# Altium PCB PCB1.PcbDoc (part 3 of 3)
Units mm, origin at the board's own origin, x right, y up, seen from the top; angles counter-clockwise.
Board outline 200 x 55 mm, 4 copper layers (Top Layer, Layer 1, Layer 2, Bottom Layer), stack 1.714 mm thick; 312 components, 230 nets, 1114 pads, 714 vias.
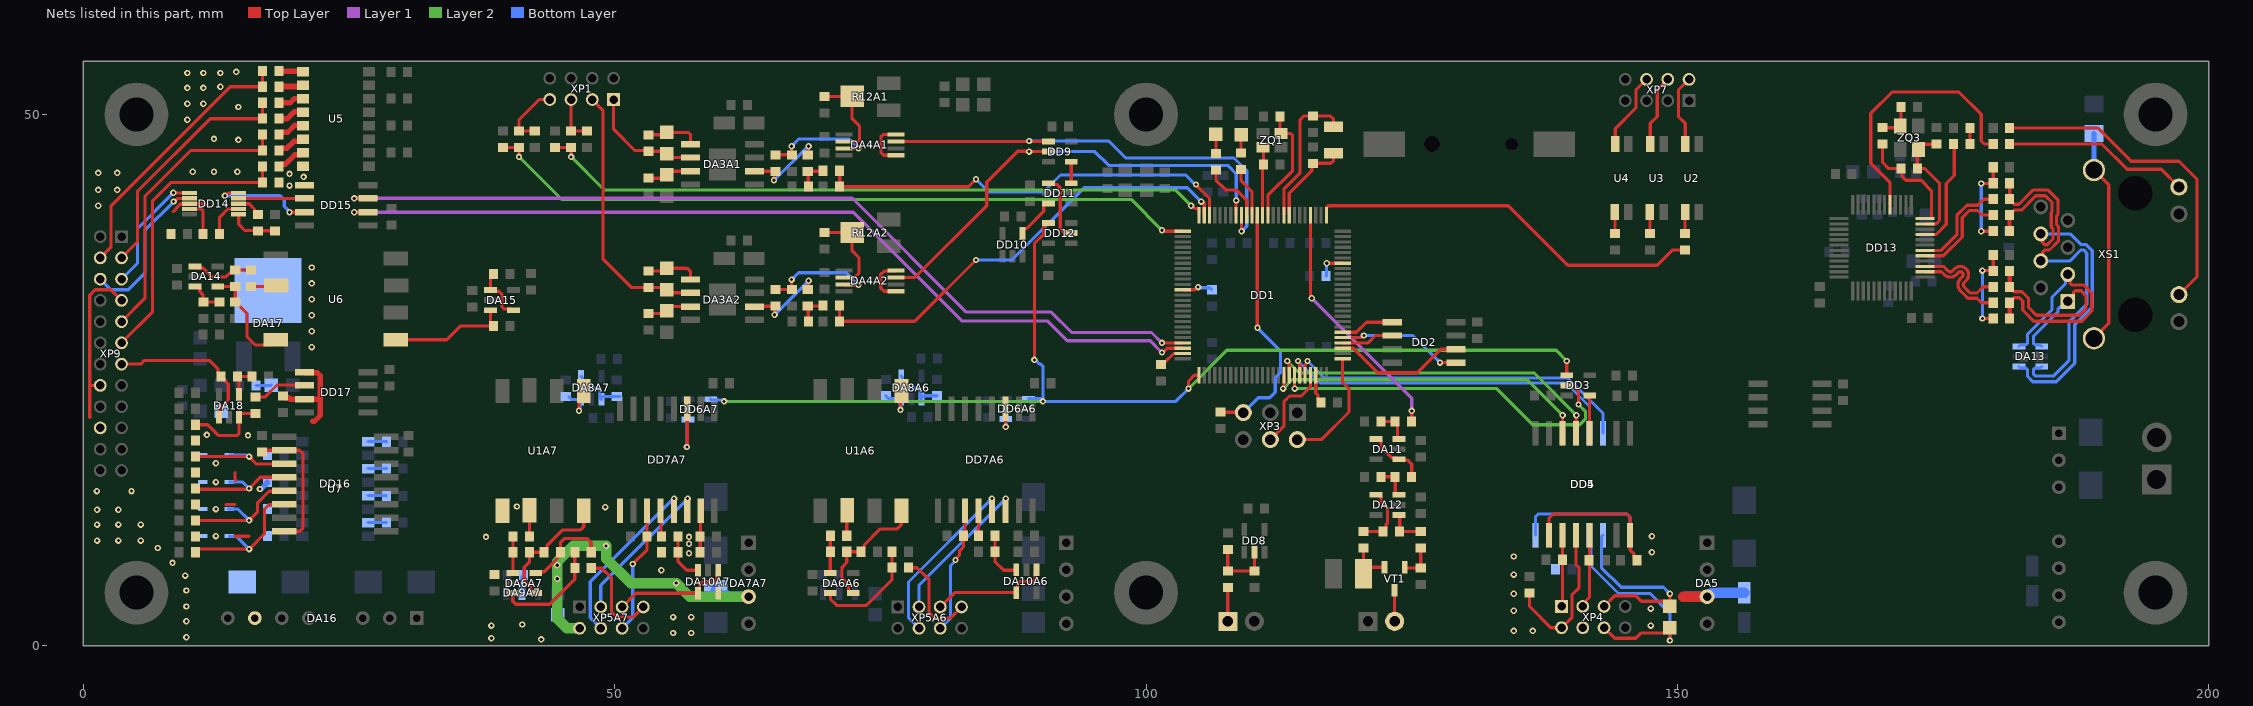
[diagram p5: the nets of this part, all layers, seen from the top]

## Via types
v1: diameter 0.6, hole 0.3, Top Layer to Bottom Layer, tented both sides, 714 vias

## Nets (pads, with @x,y where several pads share a name; then routed paths per layer and width w, separated by ;. In a path a pad name is that pad's centre, name@x,y a point inside that pad or via, vN(x,y) a via of type N, cw(c..) or ccw(c..) an arc to the next point about the centre after c; other vN are vias at no path point) (continued)
GND_DRVA7: C41A7.2 C43A7.2 C44A7.2 C45A7.1 C46A7.2 C48A7.2 C49A7.2 DA6A7.5 DA7A7.3 DA9A7.2 DA10A7.5 DD7A7.9 DD7A7.15 R22A7.2 R24A7.2 U1A7.1 XP5A7.2 | length 46.4
  Top Layer w0.3: DA6A7.5@42.566,6.85 42.679,6.964 43.364,6.964 44.625,8.225 44.625,8.525 R24A7.2@44.9,8.8 44.9,9.7 45.3,10.1 47.4,10.1 47.8,9.7 R22A7.2@47.8,8.8 ; C48A7.2@58.05,8.8 C44A7.2@58.05,10.3 58.085,10.335 58.085,12.665 DD7A7.15@58.12,12.7
  Layer 2 w1: XP5A7.2@46.7,1.65 45.519,1.65 44.6,2.569 v1(44.6,6.3) v1(44.6,7.571) 44.6,7.9 46.1,9.4 v1(49.2,9.4) 49.2,8.2 51.5,5.9 v1(55.8,5.9) 57.08,4.62 DA7A7.3@62.6,4.62
  Bottom Layer w0.2: C49A7.2@41.3,6.559 C49A7.2@41.408,6.667
  Bottom Layer w0.3: DA9A7.2@41.3,5 41.3,5.075 C49A7.2@41.3,6.559
  Bottom Layer w1: C43A7.2@59.5,5.2 60,4.7 60.606,4.7 60.686,4.62 DA7A7.3@62.6,4.62
  other v1: 43.1,0.6 38.4,0.7 55.5,1.2 57.2,1.2 38.4,1.9 41.3,2 55.5,2.7 57.2,2.7 54.4,7.1 57,8.7 57,9.6 37.9,10.25 57,10.25 49.125,13.05 40.8,13.1
GND_HW: C78.2 C79.2 C83.2 C84.2 C91.1 C92.2 C93.2 C94.2 DA16.7 DA17.2 DD14.1 DD14.8 DD15.5 DD16.2 DD16.8 DD17.5 DD17.7 R56.1 R57.1 R59.1 R60.1 R62.1 R63.1 R64.1 R66.1 R88.1 R90.1 R91.1 R93.1 R94.1 U5.2 U5.4 U5.6 U5.8 VD3.2 VD4.2 VD5.2 VD6.2 XP9.7 XP9.16 XP9.20 | length 62.1
  Top Layer w0.3: 0.6,21.5 0.6,24.5 ; XP9.16@1.6,24.5 0.6,24.5 ; XP9.7@3.6,32.5 2.6,33.5 1.1,33.5 0.6,33 0.6,24.5 ; 8.473,40.85 8.737,41.114 8.737,41.162 9.176,41.6 DD14.8@10,41.6 11.411,41.6 11.543,41.468 ; 13.444,13.27 13.474,13.3 14.275,13.3 ; 14.275,10.3 15.6,10.3 ; 14.275,16.3 14.288,16.287 14.288,15.627 14.345,15.57 ; 14.625,40.35 14.625,39.65 15.196,39.079 16.396,39.079 C79.2@16.425,39.05 C83.2@18.025,39.05 ; C84.2@16.764,18.4 20.344,18.4 20.68,18.064 20.68,11.109 20.351,10.78 DD16.8@18.9,10.78 ; R56.1@18.404,52.621 18.534,52.75 U5.2@20.68,52.75 U5.2@20.53,52.6
  Top Layer w0.5: R62.1@18.425,46.6 18.425,46.65 18.6,46.825 19.171,46.825 19.811,47.465 20.475,47.465 U5.6@20.68,47.67 ; R59.1@18.425,49.6 19.223,49.6 19.88,50.257 20.633,50.257 U5.4@20.68,50.21 ; R56.1@18.425,52.6 U5.2@20.53,52.6 ; C92.2@18.8,23.5 18.975,23.325 19.328,23.325 19.453,23.2 22.3,23.2 ; DD17.5@20.8,25.75 20.85,25.7 22.007,25.7 22.3,25.407 22.3,23.2 ; 21.582,21.125 21.741,21.125 22.3,21.684 22.3,23.2
  Bottom Layer w0.3: C94.2@16.25,24.5 17.665,24.5 C91.1@17.7,24.535
  Bottom Layer w0.5: v1(16.621,14.75) 16.64,14.769 16.744,14.769 17.325,15.35 R91.1@17.325,15.4
  other v1: 9.7,0.8 9.7,2.3 9.7,3.7 9.7,5.2 9.6,6.6 8.4,7.8 7,9.2 1.3,9.9 3.3,9.9 5.4,9.9 12.475,10.32 1.3,11.4 3.3,11.4 5.4,11.4 1.3,12.8 3.3,12.8 12.475,12.86 1.283,14.55 4.537,14.55 12.475,15.4 12.477,17.179 15.5,19.8 11.632,19.845 21.5,28.1 21.5,29.6 21.5,31.1 21.5,32.6 21.5,34.1 21.5,35.6 1.4,41.4 1.4,42.9 3.2,42.9 19.4,43.3 20.737,44.125 19.4,44.4 1.4,44.5 3.2,44.5 10.3,44.6 12.3,44.6 14.5,44.6 14.6,47.6 12.3,47.7 9.8,49.5 14.6,50.7 9.8,51 11.3,51 9.8,52.5 11.3,52.5 12.9,52.6 9.8,53.9 11.3,53.9 12.9,53.9 14.4,54
GND_PS: C35.2 C36.2 C37.2 DA5.3 DD4.2 DD4.8 DD5.9 DD5.16 XP4.4 | length 34.3
  Top Layer w0.3: DD4.2@137.92,10.41 137.92,12.013 138.307,12.4 145.268,12.4 145.54,12.128 DD4.8@145.54,10.41 145.568,10.382 145.568,8.985 145.925,8.628 145.925,8.325 C35.2@146.2,8.05
  Top Layer w1: 150.569,4.62 DA5.3@152.8,4.62
  Bottom Layer w0.3: DD5.16@136.65,10.41 136.65,12.15 136.9,12.4 145.268,12.4 145.54,12.128 DD5.9@145.54,10.41
  Bottom Layer w1: 150.791,4.62 DA5.3@152.8,4.62 152.908,4.62 153.288,5 C37.2@156.3,5
  other v1: 134.6,1.4 136.4,1.4 147.5,1.9 134.6,3.3 147.5,3.5 134.6,4.9 134.6,6.7 134.6,8.4 147.6,8.8 147.6,10.3
GUIDE_LAS: DD1.4 R29.1 | length 23.4
  Top Layer w0.3: DD1.4@115.475,40.525 115.475,32.906 115.6,32.781 v1(115.6,32.7) ; R29.1@125,21.1 v1(125,22.1)
  Layer 1 w0.3: v1(115.6,32.7) 125,23.3 v1(125,22.1)
IL1_HW: R56.2 R69.1 XP9.4 | length 25.8
  Top Layer w0.3: XP9.4@1.6,36.5 2.6,37.5 2.6,41.376 13.824,52.6 R56.2@16.949,52.6 ; R56.2@16.875,52.6 R69.1@16.875,54.1
IL2_HW: R59.2 R70.1 XP9.3 | length 23
  Top Layer w0.3: XP9.3@3.6,36.5 5.1,38 5.1,42.77 11.93,49.6 R59.2@16.875,49.6 R70.1@16.875,51.1
INT_IL: DD1.51 DD3.1 DD6A6.1 DD6A7.1 DD12.4 | length 105.5
  Top Layer w0.3: v1(89.5,26.9) 89.5,37.858 90.374,38.732 90.374,39.658 90.499,39.783 DD12.4@90.824,39.783 ; v1(104,24.2) 104.001,24.902 104.551,25.453 104.975,25.453 DD1.51@104.975,25.474 ; DD3.1@139.6,25.45 v1(139.6,26.8)
  Layer 2 w0.3: v1(60.3,23) v1(90.3,23) ; v1(104,24.2) 107.601,27.8 138.601,27.8 v1(139.6,26.8)
  Bottom Layer w0.3: DD6A7.1@59.05,23.2 59.132,23.119 60.1,23.119 60.219,23 v1(60.3,23) ; DD6A6.1@88.951,23.248 DD6A6.1@89.276,23.248 ; DD6A6.1@89.401,23.248 90.252,23.248 v1@90.3,23.2 ; v1(89.5,26.9) 89.581,26.9 89.969,26.512 90.088,26.512 90.3,26.3 v1@90.3,23.2 ; v1@104,24.199 102.801,23 v1(90.3,23) v1@90.3,23.2
KEY_HW: R62.2 R71.1 XP9.9 | length 27
  Top Layer w0.3: XP9.9@3.6,30.5 5.8,32.7 5.8,42.279 10.121,46.6 R62.2@16.85,46.6 ; R62.2@16.875,46.6 R71.1@16.875,48.1
LED1: DD1.15 R5.1 | length 4.7
  Top Layer w0.3: R5.1@108.95,44.8 108.95,43.75 109.975,42.725 DD1.15@109.975,40.525
LED2: DD1.16 R6.1 | length 6
  Top Layer w0.3: R6.1@106.582,44.777 106.582,43.818 107.5,42.9 108.5,42.9 109.475,41.925 DD1.16@109.475,40.525
LNKn: DD13.17 R50.2 | length 25.2
  Top Layer w0.3: DD13.17@170,41.5 170,43.6 168.2,45.4 168.2,50.1 170.2,52.1 176.5,52.1 178.6,50 178.6,47.5 178.888,47.212 R50.2@179.725,47.212
MEM_CS: DD1.81 DD2.1 | length 5.1
  Top Layer w0.3: DD1.81@118.5,29.5 119.8,29.5 120.746,30.446 DD2.1@123.171,30.446
MEM_MISO: DD1.79 DD2.2 | length 5
  Top Layer w0.3: DD1.79@118.5,28.5 120.9,28.5 121.596,29.196 DD2.2@123.171,29.196
MEM_MOSI: DD1.80 DD2.5 | length 11.8
  Top Layer w0.3: DD1.80@118.5,29 120.192,29 120.392,29.2 v1(120.5,29.2) ; v1(127.671,26.646) DD2.5@129.171,26.646
  Bottom Layer w0.3: v1(120.5,29.2) 125.116,29.2 v1(127.671,26.646)
MEM_SCLK: DD1.78 DD2.6 | length 12.5
  Top Layer w0.3: DD1.78@118.5,28 119.5,28 121.812,25.688 125.513,25.688 127.721,27.896 DD2.6@129.171,27.896
MP_EN_HW: R64.2 R72.1 XP9.11 | length 27.1
  Top Layer w0.3: XP9.11@3.6,28.5 6.5,31.4 6.5,41.83 8.27,43.6 R64.2@16.8,43.6 ; R64.2@16.875,43.6 R72.1@16.875,45.1
NetC12_1: C12.1 DD1.49 | length 2.5
  Top Layer w0.3: C12.1@101.4,26.45 101.675,26.725 101.826,26.725 102.601,27.5 DD1.49@103.45,27.5
NetC14_1: C14.1 DD1.73 | length 2.8
  Top Layer w0.3: DD1.73@115.975,25.475 115.975,23.777 116.183,23.569 116.183,23.167 C14.1@116.45,22.9
NetC23A1_2: C23A1.2 DA3A1.3 R7A1.1 | length 4.2
  Top Layer w0.3: C23A1.2@53.18,44 54.615,44 R7A1.1@54.915,44.3 55.265,44.65 DA3A1.3@57.15,44.65
NetC23A2_2: C23A2.2 DA3A2.3 R7A2.1 | length 4.2
  Top Layer w0.3: C23A2.2@53.179,31.253 54.649,31.253 R7A2.1@54.914,31.518 55.312,31.916 DA3A2.3@57.149,31.916
NetC24A1_1: C24A1.1 DA3A1.1 R8A1.1 | length 5
  Top Layer w0.3: C24A1.1@53.18,48.085 54.7,48.085 R8A1.1@54.915,48.3 56.95,48.3 57.15,48.1 DA3A1.1@57.15,47.2
NetC24A2_1: C24A2.1 DA3A2.1 R8A2.1 | length 4.9
  Top Layer w0.3: C24A2.1@53.179,35.253 54.649,35.253 R8A2.1@54.914,35.518 56.822,35.518 57.149,35.191 DA3A2.1@57.149,34.466
NetC27A1_1: C27A1.1 DA4A1.3 R9A1.2 | length 10.7
  Top Layer w0.3: R9A1.2@65.15,46.2 C27A1.1@66.674,46.2 66.65,46.224 v1(66.65,47) ; DA4A1.3@71.574,46.8 v1(72.95,46.8)
  Bottom Layer w0.3: v1(66.65,47) 67.35,47.7 72.05,47.7 v1(72.95,46.8)
NetC27A2_1: C27A2.1 DA4A2.3 R9A2.2 | length 10.9
  Top Layer w0.3: R9A2.2@65.149,33.541 65.154,33.536 66.668,33.536 C27A2.1@66.673,33.531 66.649,33.555 v1(66.649,34.453) ; DA4A2.3@71.573,34.006 71.599,33.979 72.923,33.979 v1(72.949,33.953)
  Bottom Layer w0.3: v1(66.649,34.453) 67.299,35.103 71.799,35.103 v1(72.949,33.953)
NetC42A6_1: C42A6.1 DA6A6.1 R23A6.1 | length 3.5
  Top Layer w0.3: R23A6.1@70.291,10.35 C42A6.1@70.291,8.85 70.291,6.859 DA6A6.1@70.3,6.85
NetC42A6_2: C42A6.2 DA6A6.4 R24A6.1 U1A6.4 | length 12.5
  Top Layer w0.3: DA6A6.4@72.45,4.95 72.125,4.95 72,5.075 72,5.738 71.4,6.338 71.4,7.4 71.841,7.841 C42A6.2@71.841,8.85 R24A6.1@73.191,8.85 73.466,9.125 73.466,9.466 75,11 76.587,11 76.987,11.4 76.987,12.746 U1A6.4@76.991,12.75
NetC42A7_1: C42A7.1 DA6A7.1 R23A7.1 | length 3.5
  Top Layer w0.3: DA6A7.1@40.416,6.85 40.45,6.884 C42A7.1@40.45,8.8 R23A7.1@40.45,10.3
NetC42A7_2: C42A7.2 DA6A7.4 R24A7.1 U1A7.4 | length 12.5
  Top Layer w0.3: DA6A7.4@42.566,4.95 42.241,4.95 42.116,5.075 42.116,5.584 41.5,6.2 41.5,7.4 42,7.9 C42A7.2@42,8.8 R24A7.1@43.35,8.8 43.625,9.075 43.625,9.425 45.1,10.9 46.8,10.9 47.1,11.2 U1A7.4@47.1,12.7
NetC46A6_1: C46A6.1 DA10A6.3 R26A6.2 | length 4.8
  Top Layer w0.3: R26A6.2@85.791,10.35 C46A6.1@85.791,8.85 85.791,7.909 86.6,7.1 87.741,7.1 DA10A6.3@87.791,7.15
NetC46A7_1: C46A7.1 DA10A7.3 R26A7.2 | length 4.6
  Top Layer w0.3: R26A7.2@55.95,10.3 55.95,7.95 56.8,7.1 DA10A7.3@57.85,7.1
NetC51_1: C51.1 DA11.3 R29.2 | length 3.1
  Top Layer w0.3: C51.1@122.1,21.1 R29.2@123.45,21.1 123.675,20.875 DA11.3@123.675,19.45
NetC54_1: C54.1 DA12.1 R32.1 | length 3.5
  Top Layer w0.3: DA12.1@123.871,12.307 C54.1@123.871,10.757 R32.1@125.871,10.757
NetC54_2: C54.2 DA12.4 R33.1 | length 6.1
  Top Layer w0.3: R33.1@120.471,10.757 C54.2@122.321,10.757 122.596,11.032 122.596,11.447 122.731,11.583 122.731,12.869 122.1,13.5 122.1,13.907 122.1,14.082 121.975,14.207 DA12.4@121.65,14.207
NetC55_1: C55.1 DD8.2 R39.2 R40.1 | length 6.3
  Top Layer w0.3: R40.1@107.7,9.05 R39.2@107.7,7.05 C55.1@110.2,7.05 DD8.2@110.2,8.8
NetC62_1: C62.1 XS1.13 XS1.14 | length 20.4
  Top Layer w0.3: XS1.13@189.2,28.932 190.6,30.332 190.6,43.372 XS1.14@189.2,44.772
  Bottom Layer w0.5: XS1.14@189.2,44.772 C62.1@189.2,48.2
NetC64_1: C64.1 R41.2 R42.2 | length 8.1
  Top Layer w0.3: v1(178.7,30.8) 179.703,30.8 R41.2@179.725,30.778 ; v1(178.7,35.3) 179.703,35.3 R42.2@179.725,35.278 C64.1@179.725,36.778
  Bottom Layer w0.3: v1(178.7,30.8) v1(178.7,35.3)
NetC65_1: C65.1 R43.2 R44.2 | length 8.3
  Top Layer w0.3: v1(178.6,39) 179.7,39 R43.2@179.725,39.025 ; v1(178.6,43.5) 179.7,43.5 R44.2@179.725,43.525 C65.1@179.725,45.025
  Bottom Layer w0.3: v1(178.6,39) v1(178.6,43.5)
NetC69_1: C69.1 R54.2 ZQ3.3 | length 3.6
  Top Layer w0.3: R54.2@169.3,48.75 170.825,48.75 ZQ3.3@170.975,48.9 171.05,48.975 C69.1@171.05,50.7
NetC79_1: C79.1 DD14.3 | length 2.4
  Top Layer w0.3: DD14.3@14.6,41.6 15.6,41.6 16.1,41.1 16.1,40.875 16.375,40.6 C79.1@16.425,40.6
NetC81_1: C81.1 DD14.9 | length 3.4
  Top Layer w0.3: DD14.9@10.117,41.1 11.099,41.1 11.275,40.924 C81.1@11.275,38.75
NetC81_2: C81.2 DD14.2 | length 3.7
  Top Layer w0.3: C81.2@12.825,38.75 12.825,40.325 13.6,41.1 DD14.2@14.6,41.1
NetC82_1: C82.1 DA14.1 R75.1 | length 6
  Top Layer w0.3: DA14.1@10.502,35.7 10.627,35.575 11.225,35.575 12.09,34.71 13.413,34.71 13.777,35.075 14.025,35.075 C82.1@14.3,35.35 ; C82.1@14.25,35.35 R75.1@15.8,35.35
NetC82_2: C82.2 DA14.4 R77.1 U6.4 | length 10.1
  Top Layer w0.3: DA14.4@12.652,33.8 C82.2@14.3,33.8 R77.1@14.3,32.35 14.35,32.35 15.4,31.3 15.4,29.1 16.2,28.3 17.624,28.3 U6.4@18.124,28.8
NetC95_1: C95.1 DA18.3 R87.2 | length 7.9
  Top Layer w0.3: C95.1@10.575,20.8 11.7,20.8 12.7,19.8 14.482,19.8 14.658,19.976 14.658,21.725 14.783,21.85 R87.2@16.2,21.85
NetDA3A1_6: DA3A1.6 R9A1.1 R10A1.1 | length 8.3
  Top Layer w0.3: DA3A1.6@63.15,44.65 R9A1.1@65.15,44.65 65,44.5 v1(65,43.8) ; R10A1.1@68.174,46.2 68.25,46.276 v1(68.25,47)
  Bottom Layer w0.3: v1(65,43.8) 68.2,47 v1(68.25,47)
NetDA3A2_6: DA3A2.6 R9A2.1 R10A2.1 | length 8.2
  Top Layer w0.3: DA3A2.6@63.149,31.916 63.186,31.954 65.111,31.954 65.049,31.891 v1(65.049,31.153) ; R10A2.1@68.173,33.531 68.249,33.607 v1(68.249,34.353)
  Bottom Layer w0.3: v1(65.049,31.153) v1(68.249,34.353)
NetDA4A1_2: DA4A1.2 R11A1.2 R12A1.2 | length 8.5
  Top Layer w0.3: R11A1.2@69.747,51.7 R12A1.2@72.347,51.7 72.347,49.575 73.047,48.875 73.047,47.626 72.871,47.45 DA4A1.2@71.574,47.45
NetDA4A1_5: DA4A1.5 DA4A1.8 | length 4.5
  Top Layer w0.3: DA4A1.5@76.474,46.15 75.32,46.15 75.05,46.42 75.05,47.9 75.25,48.1 DA4A1.8@76.474,48.1
NetDA4A2_2: DA4A2.2 R11A2.2 R12A2.2 | length 8.3
  Top Layer w0.3: R11A2.2@69.747,38.9 R12A2.2@72.347,38.9 72.347,37.159 72.993,36.512 72.993,35.047 72.606,34.659 71.577,34.659 DA4A2.2@71.573,34.656
NetDA4A2_5: DA4A2.5 DA4A2.8 | length 4.4
  Top Layer w0.3: DA4A2.5@76.473,33.356 75.346,33.356 75.049,33.653 75.049,34.953 75.352,35.256 76.423,35.256 DA4A2.8@76.473,35.306
NetDA6A6_3: DA6A6.3 R21A6.2 R22A6.1 | length 10.2
  Top Layer w0.3: DA6A6.3@70.3,4.95 70.3,4.4 70.9,3.8 73.7,3.8 76.091,6.191 R21A6.2@76.091,7.35 R22A6.1@76.091,8.85
NetDA6A7_3: DA6A7.3 R21A7.2 R22A7.1 | length 10.2
  Top Layer w0.3: DA6A7.3@40.416,4.95 40.416,4.184 40.7,3.9 43.9,3.9 46.25,6.25 R21A7.2@46.25,7.3 R22A7.1@46.25,8.8
NetDA8A6_1: DA8A6.1 DA8A6.4 R28A6.1 | length 5.3
  Bottom Layer w0.3: DA8A6.4@76.968,25.375 77.093,25.25 77.093,24.602 77.393,24.302 78.476,24.302 78.743,24.035 78.743,23.35 DA8A6.1@78.868,23.225 78.868,23.401 78.993,23.526 R28A6.1@80.327,23.526
NetDA8A6_3: DA8A6.3 R27A6.1 U1A6.5 | length 4.4
  Top Layer w0.3: v1(76.9,22.2) 76.9,23.884 U1A6.5@76.991,23.975
  Bottom Layer w0.3: R27A6.1@75.527,23.526 75.802,23.251 76.027,23.251 76.028,23.25 DA8A6.3@76.968,23.25 ; v1(76.9,22.2) 76.934,22.234 76.934,23.191 DA8A6.3@76.968,23.225
NetDA8A7_1: DA8A7.1 DA8A7.4 R28A7.1 | length 5.6
  Bottom Layer w0.3: DA8A7.4@46.85,25.35 46.972,25.228 46.972,24.446 47.147,24.27 48.454,24.27 48.63,24.095 48.63,23.32 DA8A7.1@48.75,23.2 48.75,23.325 48.875,23.45 R28A7.1@50.5,23.45
NetDA8A7_3: DA8A7.3 R27A7.1 U1A7.5 | length 4.5
  Top Layer w0.3: v1(46.65,22.11) 46.65,23.525 U1A7.5@47.1,23.975
  Bottom Layer w0.3: R27A7.1@45.7,23.45 45.975,23.175 46.425,23.175 46.85,23.175 46.733,23.058 46.733,22.275 46.65,22.192 v1(46.65,22.11)
NetDA10A6_1: DA10A6.1 DA10A6.4 XP5A6.5 | length 11.4
  Top Layer w0.3: XP5A6.5@80.641,3.65 81.991,5 DA10A6.4@87.791,5 87.916,5.125 87.916,5.874 88.091,6.05 89.39,6.05 89.566,6.225 89.566,7.025 DA10A6.1@89.691,7.15
NetDA10A7_1: DA10A7.1 DA10A7.4 XP5A7.5 | length 11.3
  Top Layer w0.3: XP5A7.5@50.7,3.65 52,4.95 DA10A7.4@57.85,4.95 57.975,5.075 57.975,5.775 58.2,6 59.3,6 59.625,6.325 59.625,6.975 DA10A7.1@59.75,7.1
NetDA11_1: DA11.1 DA11.4 R30.1 | length 5.9
  Top Layer w0.3: DA11.4@121.65,19.45 121.975,19.45 122.1,19.325 122.1,18.7 123.125,17.675 123.675,17.675 123.881,17.469 124.631,17.469 125,17.1 R30.1@125,15.9
NetDA12_3: DA12.3 R30.2 R31.1 | length 3.4
  Top Layer w0.3: R31.1@122.1,15.9 R30.2@123.45,15.9 123.45,14.332 123.575,14.207 DA12.3@123.871,14.207
NetDA14_3: DA14.3 R61.2 R65.1 | length 3.5
  Top Layer w0.3: DA14.3@10.502,33.8 10.827,33.8 10.952,33.675 10.952,33.35 11.253,33.049 11.253,32.397 R61.2@11.3,32.35 R65.1@12.8,32.35
NetDA15_1: DA15.1 DA15.4 R82.1 | length 5.3
  Top Layer w0.3: R82.1@38.6,34.979 38.6,34.929 38.324,34.653 DA15.1@38.324,33.479 38.442,33.362 39.118,33.362 39.4,33.079 39.4,31.88 39.576,31.704 40.349,31.704 DA15.4@40.474,31.579
NetDA15_3: DA15.3 R81.1 U6.5 | length 11.2
  Top Layer w0.3: U6.5@29.399,28.8 34.2,28.8 35.479,30.079 R81.1@38.325,30.079 ; DA15.3@38.324,31.579 38.324,30.854 38.325,30.853 R81.1@38.325,30.079 ; R81.1@38.6,30.079 R81.1@38.325,30.079
NetDA18_4: DA18.4 R89.2 R92.1 | length 3.2
  Top Layer w0.3: DA18.4@14.658,23.65 14.658,25.197 R92.1@14.505,25.35 15.949,25.35 R89.2@15.966,25.333
NetDD1_37: DD1.37 R3.1 | length 2.9
  Top Layer w0.3: DD1.37@103.45,33.5 104.586,33.5 104.836,33.75 v1(104.9,33.75)
  Bottom Layer w0.3: v1(104.9,33.75) 104.957,33.693 105.998,33.693 R3.1@106.134,33.556
NetDD1_94: DD1.94 R4.1 | length 2.7
  Top Layer w0.3: v1(117,36) 117.75,36 DD1.94@118.5,36
  Bottom Layer w0.3: R4.1@116.95,34.8 116.975,34.825 116.975,35.975 v1(117,36)
NetDD3_4: DD3.4 DD4.12 | length 3.5
  Top Layer w0.3: DD4.12@141.73,20.01 DD3.4@141.73,23.55
NetDD4_3: DD4.3 R17.2 XP4.1 | length 6.7
  Top Layer w0.3: XP4.1@139.1,3.7 139.19,3.79 DD4.3@139.19,10.41
NetDD4_4: DD4.4 R19.2 XP4.2 | length 14.6
  Top Layer w0.3: R19.2@136.1,4.95 136.1,3.7 138.1,1.7 XP4.2@139.1,1.7 140.1,2.7 140.1,4.826 140.75,5.476 140.75,7.351 140.46,7.641 DD4.4@140.46,10.41
NetDD4_5: DD4.5 R20.2 XP4.3 | length 7
  Top Layer w0.3: XP4.3@141.1,3.7 141.1,3.925 141.73,4.555 DD4.5@141.73,10.41
NetDD5_11: DD5.11 R18.1 XP4.5 | length 18.8
  Top Layer w0.3: XP4.5@143.1,3.7 144.1,4.7 146.1,4.7 146.615,4.185 148.815,4.185 R18.1@149.3,3.7 v1(149.3,4.9)
  Bottom Layer w0.3: DD5.11@143,10.41 142.856,10.266 142.856,7.359 144.715,5.5 148.7,5.5 v1(149.3,4.9)
NetDD5_12: DD5.12 R18.2 XP4.6 | length 23
  Top Layer w0.3: XP4.6@143.1,1.7 144.1,0.7 146.1,0.7 146.615,1.215 148.815,1.215 R18.2@149.3,1.7 v1(149.3,0.5)
  Bottom Layer w0.3: DD5.12@141.73,10.41 141.872,10.267 141.872,7.507 144.463,4.916 147.459,4.916 149.3,3.075 v1(149.3,0.5)
NetDD6A6_4: DD6A6.4 DD7A6.3 | length 2.5
  Top Layer w0.3: DD7A6.3@86.781,22.35 86.79,22.34 86.79,20.61 v1(86.8,20.6)
  Bottom Layer w0.3: v1(86.8,20.6) DD6A6.4@86.8,21.348
NetDD6A7_4: DD6A7.4 DD7A7.3 | length 6.3
  Top Layer w0.3: v1(56.8,18.7) 56.825,18.725 56.825,22.275 DD7A7.3@56.85,22.3
  Bottom Layer w0.3: v1(56.8,18.7) 56.8,21.2 DD6A7.4@56.9,21.3
NetDD7A6_11: DD7A6.11 R25A6.1 XP5A6.6 | length 12
  Top Layer w0.3: v1(82.072,8.072) 82.072,8.153 82.458,8.539 82.458,8.958 82.841,9.341 R25A6.1@82.841,10.35 ; R25A6.1@82.891,10.35 82.971,10.35 DD7A6.11@82.971,12.7
  Bottom Layer w0.3: XP5A6.6@80.641,1.65 81.6,2.609 81.6,7.519 82.072,7.991 v1(82.072,8.072)
NetDD7A6_12: DD7A6.12 R26A6.1 | length 2.4
  Top Layer w0.3: R26A6.1@84.241,10.35 DD7A6.12@84.241,12.75
NetDD7A6_13: DD7A6.13 XP5A6.4 | length 17
  Top Layer w0.3: v1(85.5,13.85) 85.505,13.845 85.505,12.705 DD7A6.13@85.511,12.7
  Bottom Layer w0.3: XP5A6.4@78.641,1.65 77.653,2.637 77.653,6.003 v1(85.5,13.85)
NetDD7A6_14: DD7A6.14 XP5A6.3 | length 14.7
  Top Layer w0.3: DD7A6.14@86.781,12.7 86.79,12.71 86.79,13.84 v1(86.8,13.85)
  Bottom Layer w0.3: XP5A6.3@78.641,3.65 78.641,5.691 v1(86.8,13.85)
NetDD7A7_11: DD7A7.11 R25A7.1 XP5A7.6 | length 12
  Top Layer w0.3: v1(51.7,7.7) 53.05,9.05 R25A7.1@53.05,10.3 53.045,10.305 53.045,12.695 DD7A7.11@53.04,12.7
  Bottom Layer w0.3: XP5A7.6@50.7,1.65 51.7,2.65 v1(51.7,7.7)
NetDD7A7_12: DD7A7.12 R26A7.1 | length 2.4
  Top Layer w0.3: DD7A7.12@54.31,12.7 54.355,12.655 54.355,10.345 R26A7.1@54.4,10.3
NetDD7A7_13: DD7A7.13 XP5A7.4 | length 17.1
  Top Layer w0.3: DD7A7.13@55.58,12.7 55.59,12.71 55.59,13.84 v1(55.599,13.85)
  Bottom Layer w0.3: XP5A7.4@48.7,1.65 47.7,2.65 47.7,6.032 55.518,13.85 v1(55.599,13.85)
NetDD7A7_14: DD7A7.14 XP5A7.3 | length 14.7
  Top Layer w0.3: DD7A7.14@56.85,12.7 56.859,12.709 56.859,13.841 v1(56.867,13.85)
  Bottom Layer w0.3: XP5A7.3@48.7,3.65 48.7,5.683 v1(56.867,13.85)
NetDD9_4: DD9.4 DD11.3 | length 2
  Top Layer w0.3: DD11.3@92.975,43.528 DD9.4@92.975,45.55
NetDD10_4: DD10.4 DD11.6 | length 4.2
  Top Layer w0.3: DD10.4@88.381,38.802 88.381,39.127 88.506,39.252 88.753,39.252 90.375,40.874 90.375,41.503 90.5,41.628 DD11.6@90.825,41.628
NetDD11_4: DD11.4 DD12.2 | length 6.4
  Top Layer w0.3: DD11.4@90.825,43.528 90.95,43.403 91.647,43.403 91.933,43.117 91.933,39.217 92.192,38.958 92.849,38.958 DD12.2@92.974,38.833
NetDD13_9: DD13.9 R53.2 | length 10.2
  Top Layer w0.3: DD13.9@173.3,38.7 174.05,38.7 174.345,38.7 175.3,39.655 175.3,43.5 176.051,44.251 R53.2@176.051,47.126
NetDD14_4: DD14.4 DD15.6 | length 6.2
  Top Layer w0.3: DD14.4@14.6,42.1 DD15.6@20.8,42.1
NetDD14_5: DD14.5 DD15.7 | length 9.9
  Top Layer w0.3: v1(13.325,42.35) 13.406,42.35 13.656,42.6 DD14.5@14.625,42.6 ; v1(19.4,40.8) DD15.7@20.8,40.8
  Bottom Layer w0.3: v1(13.325,42.35) 18.525,42.35 18.918,41.957 18.918,41.363 19.4,40.881 v1(19.4,40.8)
NetDD16_3: DD16.3 R73.2 VD6.1 | length 11
  Top Layer w0.3: R73.2@10.575,17.8 13.875,17.8 v1(15.6,17.8) 16.3,17.1 18.87,17.1 DD16.3@18.9,17.13 DD16.3@19.4,17.13
  Bottom Layer w0.3: VD6.1@13.75,17.94 15.379,17.94 15.519,17.8 v1(15.6,17.8)
NetDD16_4: DD16.4 R67.2 VD5.1 | length 10.9
  Top Layer w0.3: R67.2@10.575,14.8 10.643,14.732 15.45,14.732 15.519,14.8 v1(15.6,14.8) 16.66,15.86 DD16.4@18.9,15.86
  Bottom Layer w0.3: VD5.1@13.75,15.4 15,15.4 v1(15.6,14.8)
NetDD16_5: DD16.5 R74.2 VD4.1 | length 12.4
  Top Layer w0.3: R74.2@10.575,11.8 v1(15.6,11.8) 16.4,12.6 16.4,13.47 17.476,14.546 18.856,14.546 DD16.5@18.9,14.59
  Bottom Layer w0.3: VD4.1@13.612,12.872 14.534,12.872 v1@15.603,11.803
NetDD16_6: DD16.6 R68.2 VD3.1 | length 13.9
  Top Layer w0.3: R68.2@10.575,8.8 10.575,8.825 10.85,9.1 v1(15.6,9.1) 17.05,10.55 17.05,12.85 17.476,13.276 18.856,13.276 DD16.6@18.9,13.32
  Bottom Layer w0.3: VD3.1@13.75,10.3 13.758,10.292 14.408,10.292 v1(15.6,9.1)
NetDD17_6: DD17.6 R87.1 | length 5.1
  Top Layer w0.3: R87.1@16.2,23.4 17.09,23.4 18.225,24.535 20.765,24.535 DD17.6@20.8,24.5
NetR5_2: R5.2 VD1.1 | length 1.8
  Top Layer w0.3: R5.2@108.95,46.35 VD1.1@108.95,48.1
NetR6_2: R6.2 VD2.1 | length 1.8
  Top Layer w0.3: R6.2@106.582,46.327 VD2.1@106.582,48.127
NetR10A1_2: R10A1.2 R13A1.1 R14A1.1 | length 2.9
  Top Layer w0.3: R13A1.1@68.224,43.2 68.224,44.6 R10A1.2@68.174,44.65 69.574,44.65 R14A1.1@69.624,44.7
NetR10A2_2: R10A2.2 R13A2.1 R14A2.1 | length 2.9
  Top Layer w0.3: R13A2.1@68.223,30.531 68.223,31.931 R10A2.2@68.173,31.981 69.573,31.981 R14A2.1@69.623,32.031
NetR21A6_1: R21A6.1 XP5A6.7 | length 9.1
  Top Layer w0.3: R21A6.1@77.716,7.35 78.45,7.35 79.591,6.209 79.591,3.109 80.1,2.6 81.591,2.6 XP5A6.7@82.641,3.65
NetR21A7_1: R21A7.1 XP5A7.7 | length 9.1
  Top Layer w0.3: R21A7.1@47.8,7.3 48.8,7.3 49.7,6.4 49.7,3.2 50.2,2.7 51.75,2.7 XP5A7.7@52.7,3.65
NetR23A6_2: R23A6.2 U1A6.2 | length 2.5
  Top Layer w0.3: R23A6.2@71.841,10.35 71.841,12.75 U1A6.2@71.891,12.8
NetR23A7_2: R23A7.2 U1A7.2 | length 2.5
  Top Layer w0.3: R23A7.2@42,10.3 U1A7.2@42,12.75
NetR32_2: R32.2 R34.2 VT1.1 | length 3.5
  Top Layer w0.3: VT1.1@124.346,7.382 124.421,7.307 R34.2@125.871,7.307 ; R34.2@125.85,7.307 R32.2@125.85,9.207
NetR33_2: R33.2 R35.2 VT1.2 | length 4.6
  Top Layer w0.3: R35.2@120.446,6.782 R35.2@120.471,6.807 ; R33.2@120.471,9.207 R35.2@120.471,6.807 ; VT1.2@122.446,7.382 121.046,7.382 R35.2@120.471,6.807
NetR36_1: R36.1 U2.1 | length 2
  Top Layer w0.3: R36.1@150.7,38.8 150.7,38.875 150.725,38.9 U2.1@150.725,40.8
NetR37_1: R37.1 U3.1 | length 2
  Top Layer w0.3: R37.1@147.425,38.8 147.425,38.875 U3.1@147.425,40.8
NetR38_1: R38.1 U4.1 | length 2
  Top Layer w0.3: R38.1@144.125,38.8 144.125,38.875 U4.1@144.125,40.8
NetR39_1: R39.1 XP8.1 | length 3.2
  Top Layer w0.3: XP8.1@107.7,2.3 R39.1@107.7,5.5
NetR47_1: R47.1 XS1.10 | length 31.2
  Top Layer w0.3: R47.1@181.275,48.712 189.588,48.712 192.7,45.6 197.2,45.6 198.9,43.9 198.9,34.74 XS1.10@197.2,33.04
NetR50_1: R50.1 XS1.12 | length 17.6
  Top Layer w0.3: R50.1@181.275,47.212 189.947,47.212 192.326,44.832 195.538,44.832 XS1.12@197.2,43.17
NetR51_2: R51.2 R53.1 | length 1.5
  Top Layer w0.3: R53.1@177.525,47.212 R51.2@177.525,48.712
NetR69_2: R69.2 U5.1 | length 2.3
  Top Layer w0.3: R69.2@18.425,54.1 R69.2@18.456,54.069 ; U5.1@20.631,54.069 U5.1@20.68,54.02
  Top Layer w0.5: R69.2@18.456,54.069 U5.1@20.631,54.069
NetR70_2: R70.2 U5.3 | length 2.4
  Top Layer w0.5: R70.2@18.425,51.1 19.475,51.1 19.88,51.505 20.655,51.505 U5.3@20.68,51.48
NetR71_2: R71.2 U5.5 | length 2.7
  Top Layer w0.5: R71.2@18.425,48.1 18.425,48.15 18.6,48.325 19.239,48.325 19.88,48.966 20.654,48.966 U5.5@20.68,48.94
NetR72_2: R72.2 U5.7 | length 2.8
  Top Layer w0.5: R72.2@18.425,45.1 18.425,45.15 18.6,45.325 19.032,45.325 19.902,46.195 20.475,46.195 U5.7@20.68,46.4
NetR75_2: R75.2 U6.2 | length 2.4
  Top Layer w0.3: R75.2@15.8,33.8 18.074,33.8 U6.2@18.174,33.9
NetR83_1: R83.1 U7.1 | length 1.7
  Bottom Layer w0.3: U7.1@26.82,19.21 28.515,19.21 R83.1@28.525,19.2
NetR84_1: R84.1 U7.3 | length 1.7
  Bottom Layer w0.3: U7.3@26.82,16.67 28.495,16.67 R84.1@28.525,16.7
NetR85_1: R85.1 U7.5 | length 1.7
  Bottom Layer w0.3: U7.5@26.82,14.13 28.495,14.13 R85.1@28.525,14.1
NetR86_1: R86.1 U7.7 | length 1.7
  Bottom Layer w0.3: U7.7@26.82,11.59 26.83,11.6 R86.1@28.525,11.6
NetU2_4: U2.4 XP7.2 | length 6.8
  Top Layer w0.3: U2.4@150.75,47.2 150.75,49.15 150.1,49.8 150.1,52.3 XP7.2@151.1,53.3
NetU3_4: U3.4 XP7.4 | length 6.8
  Top Layer w0.3: U3.4@147.45,47.2 147.45,49.15 148.103,49.803 148.103,52.303 XP7.4@149.1,53.3
NetU4_4: U4.4 XP7.6 | length 7.3
  Top Layer w0.3: U4.4@144.15,47.2 144.15,48.65 146.1,50.6 146.1,52.3 XP7.6@147.1,53.3
NetVT1_3: VT1.3 XP6.2 | length 3
  Top Layer w0.3: XP6.2@123.371,2.257 123.396,2.282 VT1.3@123.396,5.232
NRST: C17.1 DD1.14 XP3.5 | length 23.7
  Top Layer w0.3: C17.1@107,22 107.03,21.97 109.13,21.97 XP3.5@109.16,21.94 ; DD1.14@110.475,40.525 110.475,29.939 v1(110.487,29.928)
  Bottom Layer w0.3: XP3.5@109.16,21.94 110.553,23.333 111.633,23.333 112.168,23.868 112.168,25.209 112.646,25.686 112.646,27.769 111.424,28.99 v1(110.487,29.928)
OSC0: C18.1 DD1.12 ZQ1.1 | length 11.3
  Top Layer w0.3: DD1.12@111.475,40.525 111.475,42.375 113.8,44.7 113.8,48.024 113.624,48.2 ZQ1.1@112.7,48.2 112.6,48.3 C18.1@112.6,49.8
OSC1: C21.1 DD1.13 ZQ1.3 | length 6.4
  Top Layer w0.3: DD1.13@110.975,40.525 110.975,45.225 C21.1@111.05,45.3 111.05,46.85 ZQ1.3@111,46.9
OSC32_0: C19.1 DD1.8 ZQ2.1 | length 8.6
  Top Layer w0.3: DD1.8@113.475,40.525 113.475,42.575 115.601,44.701 115.601,45.301 C19.1@115.7,45.4 117.4,45.4 117.65,45.65 ZQ2.1@117.65,46.35
OSC32_1: C20.1 DD1.9 ZQ2.2 | length 13.7
  Top Layer w0.3: DD1.9@112.975,40.525 112.975,42.975 114.5,44.5 114.5,49.5 114.85,49.85 C20.1@115.7,49.85 117.35,49.85 117.65,49.55 ZQ2.2@117.65,48.85
PD1: C24A1.2 DA3A1.2 R8A1.2 XP1.1 | length 11.1
  Top Layer w0.3: XP1.1@49.9,51.4 49.9,48.6 51.9,46.6 53.115,46.6 C24A1.2@53.18,46.535 54.68,46.535 R8A1.2@54.915,46.3 55.265,45.95 DA3A1.2@57.15,45.95
PD1_ADC: C28A1.1 DD1.23 R14A1.2 | length 40.2
  Top Layer w0.3: R14A1.2@71.174,44.7 C28A1.1@71.174,43.2 83.3,43.2 v1(84,43.9) ; v1(104.7,43.4) 105.975,42.125 DD1.23@105.975,40.525
  Bottom Layer w0.3: v1(84,43.9) 85.2,42.7 90.355,42.7 91.955,44.3 103.739,44.3 v1@104.639,43.4
PD1_ERR: DA4A1.7 DD1.17 DD9.1 | length 43.5
  Top Layer w0.3: DA4A1.7@76.474,47.45 88.95,47.45 v1(89,47.5) 89.05,47.45 DD9.1@90.825,47.45 ; DD1.17@108.975,40.525 108.975,39.025 v1(109,39)
  Bottom Layer w0.3: v1(89,47.5) 96.491,47.5 98.091,45.9 108.285,45.9 109.475,44.71 109.475,39.475 v1(109,39)
PD2: C24A2.2 DA3A2.2 R8A2.2 XP1.3 | length 25
  Top Layer w0.3: XP1.3@47.9,51.4 48.9,50.4 48.9,36.4 51.597,33.703 C24A2.2@53.179,33.703 54.729,33.703 55.216,33.216 DA3A2.2@57.149,33.216
PD2_ADC: C28A2.1 DD1.24 R14A2.2 | length 42.7
  Top Layer w0.3: R14A2.2@71.173,32.031 C28A2.1@71.173,30.531 78.231,30.531 v1(84,36.3) ; v1(105.198,41.798) 105.279,41.798 105.427,41.65 105.469,41.65 105.475,41.644 DD1.24@105.475,40.525
  Bottom Layer w0.3: v1(84,36.3) 87.376,36.3 94.176,43.1 103.896,43.1 v1(105.198,41.798)
PD2_ERR: DA4A2.7 DD1.18 DD9.2 | length 44.8
  Top Layer w0.3: DA4A2.7@76.473,34.656 78.256,34.656 85.023,41.423 85.023,43.623 87.928,46.528 88.972,46.528 v1(89,46.5) DD9.2@90.825,46.5 ; DD1.18@108.475,40.525 108.475,41.875 v1(108.5,41.9)
  Bottom Layer w0.3: v1(89,46.5) 95.177,46.5 96.476,45.201 107.695,45.201 108.5,44.396 v1(108.5,41.9)
PMO_HW: DA18.1 R92.2 XP9.13 | length 14.8
  Top Layer w0.3: XP9.13@3.6,26.5 5.4,26.5 5.75,26.85 11.85,26.85 12.684,26.016 12.684,25.621 R92.2@12.955,25.35 ; DA18.1@12.758,21.5 12.883,21.625 12.883,22.372 13.635,23.124 13.635,24.62 R92.2@12.955,25.3
POWER_IND: DD1.1 R36.2 | length 37.4
  Top Layer w0.3: DD1.1@116.975,40.525 116.975,41.224 117.151,41.4 134.1,41.4 139.7,35.8 148.1,35.8 149.55,37.25 R36.2@150.7,37.25
PS_ERR1: DD1.67 DD4.14 | length 31
  Top Layer w0.3: v1(112.9,24.2) 112.975,24.275 DD1.67@112.975,25.475 ; DD4.14@139.19,20.01 139.195,20.015 139.195,21.695 v1(139.2,21.7)
  Layer 2 w0.3: v1(112.9,24.2) 113.74,25.04 135.861,25.04 v1(139.2,21.7)
PS_ERR2: DD1.68 DD4.13 | length 32.4
  Top Layer w0.3: v1(113.3,26.8) 113.3,26.692 113.475,26.517 DD1.68@113.475,25.475 ; DD4.13@140.46,20.01 140.48,20.03 140.48,21.68 v1(140.5,21.7)
  Layer 2 w0.3: v1(113.3,26.8) 114.431,25.669 136.531,25.669 v1(140.5,21.7)
PS_ON: DD1.69 DD3.2 | length 34.5
  Top Layer w0.3: DD1.69@113.975,25.475 113.975,24.225 v1(114,24.2) ; DD3.2@139.6,24.5 139.725,24.375 140.225,24.375 140.7,23.9 v1(140.7,22.7)
  Layer 2 w0.3: v1(114,24.2) 132.999,24.2 136.399,20.8 140.8,20.8 141.371,21.371 141.371,22.029 v1(140.7,22.7)
RD_N: DA13.4 R43.1 R46.2 XS1.6 | length 35.9
  Top Layer w0.3: R46.2@181.275,40.525 181.275,40.575 181.698,40.998 182.379,40.998 183.729,42.347 184.635,42.347 185.25,41.732 185.25,40.806 185.19,40.746 185.19,39.394 185.35,39.234 185.35,38.281 184.806,37.737 184.558,37.737 184.382,37.913 184.382,38.575 XS1.6@184.2,38.757
  Top Layer w0.381: R43.1@181.275,39.025 R46.2@181.275,40.525
  Bottom Layer w0.3: DA13.4@182.15,26.275 182.275,26.15 182.772,26.15 182.948,25.974 182.948,25.346 183.448,24.846 185.646,24.846 187.4,26.6 187.4,30.217 188.892,31.708 188.892,31.762 189.035,31.905 189.035,37.167 188.437,37.764 187.948,37.764 186.955,38.757 XS1.6@184.2,38.757
RD_P: DA13.3 R44.1 R49.2 XS1.4 | length 35
  Top Layer w0.3: R44.1@181.275,43.525 R49.2@181.275,42.025 181.275,41.975 181.698,41.552 182.15,41.552 183.499,42.901 184.864,42.901 185.804,41.962 185.804,40.576 185.69,40.462 185.69,39.601 185.85,39.441 185.85,38.074 185.013,37.237 184.558,37.237 184.382,37.062 184.382,36.4 XS1.4@184.2,36.217
  Bottom Layer w0.3: XS1.4@184.2,36.217 186.955,36.217 187.986,37.249 188.223,37.249 188.519,36.953 188.519,32.119 186.846,30.446 186.846,26.829 185.417,25.4 183.678,25.4 183.502,25.576 183.502,25.974 183.678,26.15 184.175,26.15 DA13.3@184.3,26.275
Rx232: DD1.48 DD15.2 | length 85.1
  Top Layer w0.3: v1(25.5,40.8) DD15.2@27.001,40.8 ; v1(101.5,27.6) 101.608,27.6 102.008,28 DD1.48@103.45,28
  Layer 1 w0.3: v1(25.5,40.8) 72.456,40.8 82.706,30.55 90.755,30.55 92.605,28.7 100.4,28.7 v1(101.5,27.6)
Rx232_HW: DD14.7 XP9.6 | length 15.3
  Top Layer w0.3: v1(8.5,41.8) 8.581,41.8 8.881,42.1 DD14.7@10.571,42.1
  Bottom Layer w0.3: XP9.6@1.6,34.5 2.6,33.5 4.247,33.5 5.8,35.053 5.8,39.1 v1(8.5,41.8)
RxCAN: DD1.70 DD5.5 | length 33.1
  Top Layer w0.3: v1(114.3,26.8) 114.3,26.692 114.475,26.517 DD1.70@114.475,25.475
  Bottom Layer w0.3: v1(114.3,26.8) 116.375,24.725 139.523,24.725 141.73,22.519 DD5.5@141.73,20.01
RXI_N: DD13.5 R46.1 | length 9.4
  Top Layer w0.3: DD13.5@173.3,36.7 175.031,36.7 176.8,38.469 176.8,40.293 177.465,40.958 178.243,40.958 178.675,40.525 R46.1@179.725,40.525
RXI_P: DD13.6 R49.1 | length 9.5
  Top Layer w0.3: DD13.6@173.3,37.2 174.824,37.2 176.3,38.676 176.3,40.5 177.257,41.458 178.258,41.458 178.825,42.025 R49.1@179.725,42.025
SWCLK: DD1.76 XP3.2 | length 11.2
  Top Layer w0.3: XP3.2@114.24,19.4 116.5,19.4 119.1,22 119.1,24.178 118.5,24.778 DD1.76@118.5,27
SWDIO: DD1.72 XP3.4 | length 8.3
  Top Layer w0.3: XP3.4@111.7,19.4 113,20.7 113,22.996 113.504,23.5 114.6,23.5 115.475,24.375 DD1.72@115.475,25.475
T1: R15A3.2 R16A3.1 XP1.5 | length 4.5
  Top Layer w0.3: XP1.5@45.9,51.4 45.9,48.44 R16A3.1@45.885,48.425 R15A3.2@47.385,48.425
T1_ADC: C30A3.1 DD1.25 R16A3.2 | length 64.1
  Top Layer w0.3: C30A3.1@44.385,46.875 R16A3.2@45.885,46.875 45.9,46.86 v1(45.9,46) ; v1(104.242,41.4) 104.323,41.4 104.573,41.15 104.975,41.15 DD1.25@104.975,40.525
  Layer 2 w0.3: v1(45.9,46) 49,42.9 102.742,42.9 v1(104.242,41.4)
T2: R15A4.2 R16A4.1 XP1.7 | length 6.3
  Top Layer w0.3: R15A4.2@42.485,48.425 R16A4.1@40.985,48.425 41,48.44 41,49.505 42.895,51.4 XP1.7@43.9,51.4
T2_ADC: C30A4.1 DD1.26 R16A4.2 | length 67.7
  Top Layer w0.3: C30A4.1@39.485,46.875 R16A4.2@40.985,46.875 41,46.86 v1(41,46) ; v1(101.5,39.1) 101.581,39.1 101.681,39 DD1.26@103.45,39
  Layer 2 w0.3: v1(41,46) 45,42 98.6,42 v1(101.5,39.1)
TD_N: DA13.6 R41.1 R45.2 XS1.3 | length 25.1
  Top Layer w0.3: R45.2@181.275,32.507 181.454,32.507 181.698,32.751 182.197,32.751 182.5,32.447 182.5,31.599 183.554,30.546 188.046,30.546 189,31.5 189,33.183 188.229,33.954 187.125,33.954 186.949,34.13 186.949,34.738 XS1.3@186.74,34.947
  Top Layer w0.381: R41.1@181.275,30.778 R45.2@181.275,32.277
  Bottom Layer w0.3: DA13.6@182.15,28.175 182.275,28.3 182.772,28.3 182.948,28.476 182.948,29.331 185.25,31.633 185.25,32.812 186.531,34.093 186.531,34.738 XS1.3@186.74,34.947
TD_P: DA13.1 R42.1 R48.2 XS1.1 | length 20.6
  Top Layer w0.3: R48.2@181.275,33.778 181.275,33.728 181.698,33.305 182.426,33.305 183.054,32.676 183.054,31.829 183.783,31.1 187.817,31.1 188.446,31.729 188.446,32.954 188,33.4 187.447,33.4 187.271,33.225 187.271,32.939 XS1.1@186.74,32.407
  Top Layer w0.381: R48.2@181.275,33.778 R42.1@181.275,35.278
  Bottom Layer w0.3: DA13.1@184.3,28.175 184.175,28.3 183.678,28.3 183.502,28.476 183.502,29.102 185.804,31.404 185.804,31.682 185.98,31.857 186.19,31.857 XS1.1@186.74,32.407
Tx232: DD1.47 DD15.3 | length 85.1
  Top Layer w0.3: v1(25.5,42.1) DD15.3@26.979,42.1 ; v1(101.5,28.5) 102.3,28.5 DD1.47@103.45,28.5
  Layer 1 w0.3: v1(25.5,42.1) 25.514,42.114 72.386,42.114 83.1,31.4 91.098,31.4 93.015,29.483 100.517,29.483 v1(101.5,28.5)
Tx232_HW: DD14.6 XP9.5 | length 11.7
  Top Layer w0.3: v1(8.481,42.637) 8.5,42.619 10.016,42.619 DD14.6@10.034,42.6
  Bottom Layer w0.3: XP9.5@3.6,34.5 5.1,36 5.1,39.256 v1(8.481,42.637)
TxCAN: DD1.71 DD5.6 | length 33.1
  Top Layer w0.3: DD1.71@114.975,25.475 114.975,26.467 115.2,26.692 v1(115.2,26.8)
  Bottom Layer w0.3: v1(115.2,26.8) 116.8,25.2 139.685,25.2 143,21.885 DD5.6@143,20.01
TXO_N: DD13.2 R45.1 | length 9.4
  Top Layer w0.3: DD13.2@173.3,35.2 174.827,35.2 174.838,35.2 175.042,34.996 175.114,34.924 ; 175.115,34.923 ccw(c175.681,35.488) 176.247,34.923 176.437,35.112 cw(c176.631,34.918) 176.826,35.112 cw(c176.631,34.918) 176.826,34.723 176.636,34.534 ccw(c177.202,33.968) 176.636,33.402 177.033,33.005 177.338,32.7 177.44,32.7 178.2,32.7 178.623,32.277 R45.1@179.725,32.277
TXO_P: DD13.3 R48.1 | length 9.5
  Top Layer w0.3: DD13.3@173.3,35.7 175.045,35.7 175.186,35.559 175.396,35.349 175.469,35.276 ccw(c175.681,35.488) 175.893,35.276 176.083,35.466 cw(c176.631,34.918) 177.179,35.466 cw(c176.631,34.918) 177.181,34.371 176.989,34.18 ccw(c177.202,33.968) 176.989,33.756 177.387,33.359 177.545,33.2 177.94,33.2 178.2,33.2 178.778,33.778 R48.1@179.725,33.778
XSCI: DD13.12 R52.2 R54.1 | length 11
  Top Layer w0.3: R54.1@169.3,47.2 169.3,45.5 169.9,44.9 R52.2@171.025,44.9 171.149,44.776 171.149,44.151 171.5,43.8 172.934,43.8 173.9,42.834 173.9,40.2 DD13.12@173.3,40.2
XSCO: C67.1 DD13.11 R52.1 ZQ3.1 | length 11.4
  Top Layer w0.3: DD13.11@173.3,39.7 174.345,39.7 174.665,40.02 174.665,43.535 173.3,44.9 R52.1@172.575,44.9 172.575,46.575 ZQ3.1@172.7,46.7 172.7,46.75 173.15,47.2 C67.1@174.375,47.2
pads on no net: DA1.3 DA1.5 DA1.8 DA2.4 DA3A1.5 DA3A2.5 DA16.3 DA16.5 DA16.8 DD1.7 DD1.46 DD1.54 DD1.55 DD1.56 DD1.57 DD1.66 DD1.77 DD1.82 DD1.83 DD1.84 DD1.85 DD1.86 DD1.87 DD1.88 DD1.96 DD1.97 DD1.98 DD4.6 DD4.11 DD5.1 DD5.4 DD5.10 DD5.14 DD5.15 DD8.1 DD13.18 DD13.19 DD13.21 DD13.34 DD13.35 DD13.37 DD13.38 DD13.39 DD13.40 DD13.41 DD13.42 DD13.43 DD13.44 DD16.7 U1A6.7 U1A6.8 U1A7.7 U1A7.8 U6.7 U6.8 XP3.6 XP4.7 XP4.8 XP5A6.8 XP5A7.8 XP7.7 XP7.8 XS1. XS1.7 XS1.8

## Polygon pours and split planes (outlines as drawn)
GND on Top Layer "GND_L01_P006" (solid, remove dead copper, pour order 6): 189.4,0 189.4,11.497 184.5,11.497 184.5,21.994 189.487,21.987 192,24.5 200,24.5 200,45.497 193,45.497 190.5,47.997 190.5,54.997 155.7,54.997 155.7,42.497 140.503,42.497 140.503,55 104.4,55 104.4,48.4 102,46 97.991,46 95.5,48.491 95.5,55 85.5,55 85.5,32.991 79.009,26.5 32,26.5 32,55 25.5,55 25.5,0 33,0 33,14.9 35.6,17.5 95.5,17.5 99.5,13.5 104.4,8.6 104.4,0 128.5,0 128.5,14 132.5,18 152,18 172.003,18 180,18 180,0
GND_HW on Top Layer "GND_HW_L01_P008" (solid, remove dead copper, pour order 8): 9,0 9,6.5 6.5,9 0,9 0,46 6,46 9,49 9,55 22,55 22,0
GND_DRVA7 on Top Layer "GND_DRVA7_L01_P002" (solid, remove dead copper, pour order 2): 37.3,13.85 37.3,0.002 60.8,0.002 60.8,13.85
GND_PS on Top Layer "GND_PS_L01_P013" (solid, remove dead copper, pour order 13): 133.5,0 133.5,15.5 151,15.5 151,0
GND_DRVA6 on Top Layer "GND_DRVA6_L01_P000" (solid, remove dead copper, pour order 0): 67.2,13.85 67.2,0 90.8,0 90.8,13.85
AGND on Top Layer "AGND_L01_P017" (solid, remove dead copper, pour order 17): 35.5,55 35.5,28.5 76.5,28.5 83.5,35.5 83.5,55
GND on Bottom Layer "GND_L04_P009" (solid, remove dead copper, pour order 9): 200,24.5 189,24.5 186.98,22.48 176.482,22.48 172.002,18 132.5,18 128.5,14 128.5,0 104.4,0 104.4,8.6 99.5,13.5 95.5,17.5 38.01,17.5 33,12.49 33,0 25.5,0 25.5,19 25.5,55 32,55 32,25.5 38,19.5 54.496,19.5 54.496,26.5 71.5,26.5 71.5,19.5 84.501,19.5 84.501,55 95.5,55 95.5,48.491 97.992,45.998 101.998,45.998 104.4,48.4 104.4,55 140.503,55 140.503,42.5 155.7,42.5 155.7,55 190.5,55 190.5,49 193.502,45.998 200,45.998
GND_HW on Bottom Layer "GND_HW_L04_P015" (solid, remove dead copper, pour order 15): 9,0 9,6.5 6.5,9 0,9 0,46 6,46 9,49 9,55 22,55 22,0
GND_DRVA7 on Bottom Layer "GND_DRVA7_L04_P003" (solid, remove dead copper, pour order 3): 40,15.5 37.3,12.8 37.3,0.002 60.8,0.002 60.8,15.5
AGND on Bottom Layer "AGND_L04_P005" (solid, remove dead copper, pour order 5): 35.5,55 35.5,25.003 40.003,20.5 52.499,20.5 52.499,28.5 73.5,28.5 73.5,20.5 82.001,20.5 82.001,55
GND_DRVA6 on Bottom Layer "GND_DRVA6_L04_P001" (solid, remove dead copper, pour order 1): 67.2,15.5 67.2,0 90.7,0 90.7,15.5
GND_PS on Bottom Layer "GND_PS_L04_P012" (solid, remove dead copper, pour order 12): 133.5,0 133.5,15.5 151.1,15.5 151.1,0
GND on Layer 2 "GND_L03_P018" (solid, remove dead copper, pour order 18): 25.5,55 32,55 32,26.5 79.009,26.5 85.5,32.991 85.5,55 95.5,55 95.5,48.4 97.902,45.998 101.998,45.998 104.4,48.4 104.4,55 140.55,55 140.503,42.497 155.7,42.497 155.7,55 190.5,55 190.5,49 193.502,45.998 200,45.998 200,24.5 192,24.5 189.4,21.928 184.5,21.994 184.5,11.497 189.4,11.497 189.4,0 180.009,0 180.009,18 132.5,18 128.5,14 128.5,0 104.4,0 104.4,8.6 95.5,17.5 38.01,17.5 33,12.49 33,0 25.5,0
GND_HW on Layer 2 "GND_HW_L03_P016" (solid, remove dead copper, pour order 16): 9,0 9,6.5 6.5,9 0,9 0,46 6,46 9,49 9,55 22,55 22,0
AGND_HW on Layer 2 "AGND_HW_L03_P007" (solid, remove dead copper, pour order 7): 7.5,35.995 11.4,35.995 12.405,37 20.5,37 20.5,26 17.5,23 17.5,19.2 7.5,19.2 7.5,36.1
AGND on Layer 2 "AGND_L03_P004" (solid, remove dead copper, pour order 4): 35.5,55 35.5,28.5 76.5,28.5 83.5,35.5 83.5,55

## Silkscreen, mask and mechanical layers (free items; w line width, h text height)
Top Assy:
  circle w0.2: c100,50 r1.6
  circle w0.2: c100,5 r1.6
  circle w0.2: c5,50 r1.6
  circle w0.2: c195,50 r1.6
  circle w0.2: c195,5 r1.6
  circle w0.2: c5,5 r1.6
Bottom Assy:
  circle w0.2: c100,50 r1.6
  circle w0.2: c100,5 r1.6
  circle w0.2: c5,50 r1.6
  circle w0.2: c195,50 r1.6
  circle w0.2: c195,5 r1.6
  circle w0.2: c5,5 r1.6
Board Outline:
  the board outline again, w0.2